# EAGLE board IV9 (EAGLE 9.6.2)
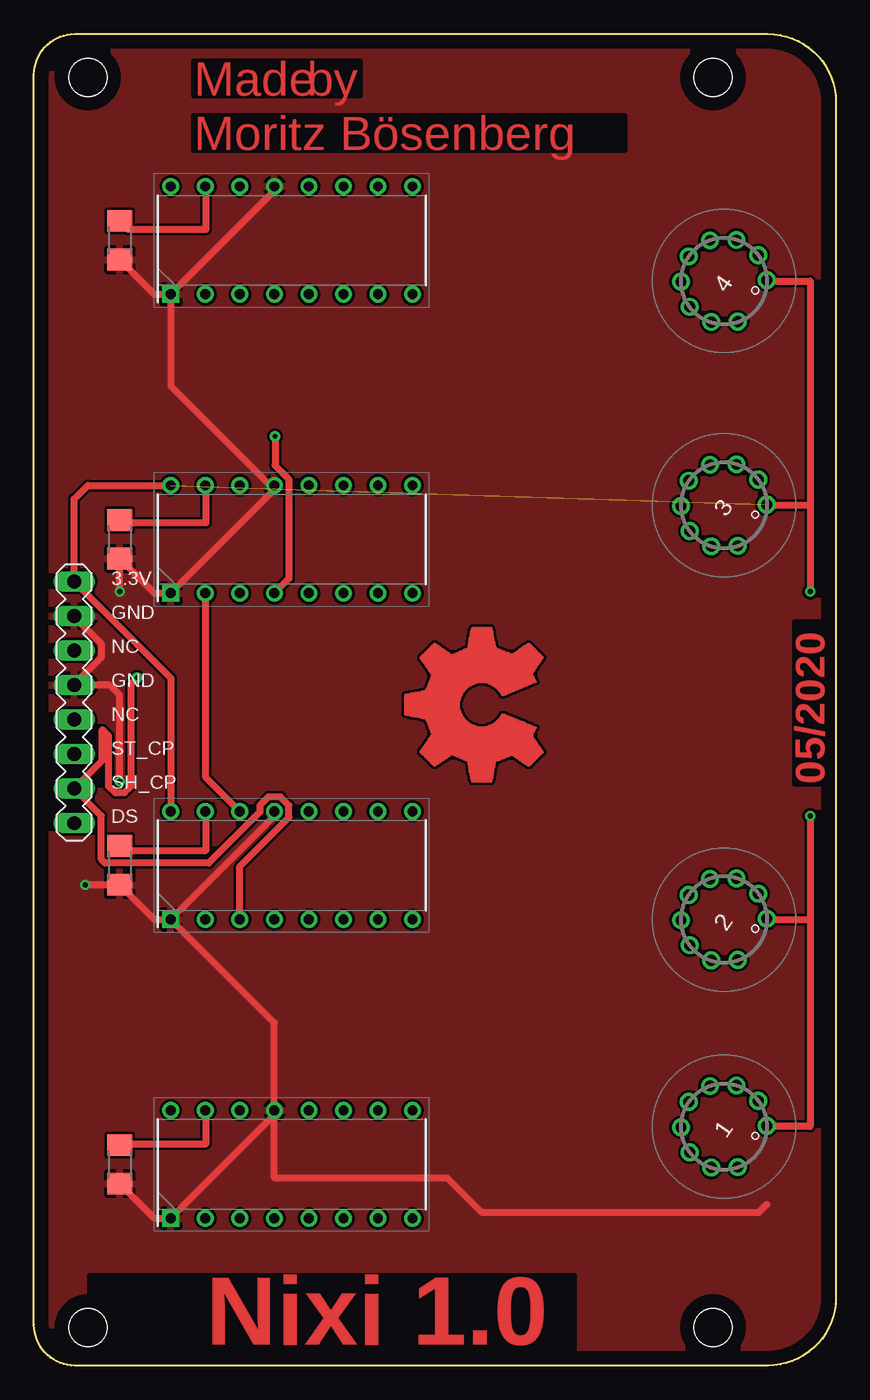
[diagram p0: board, top side]
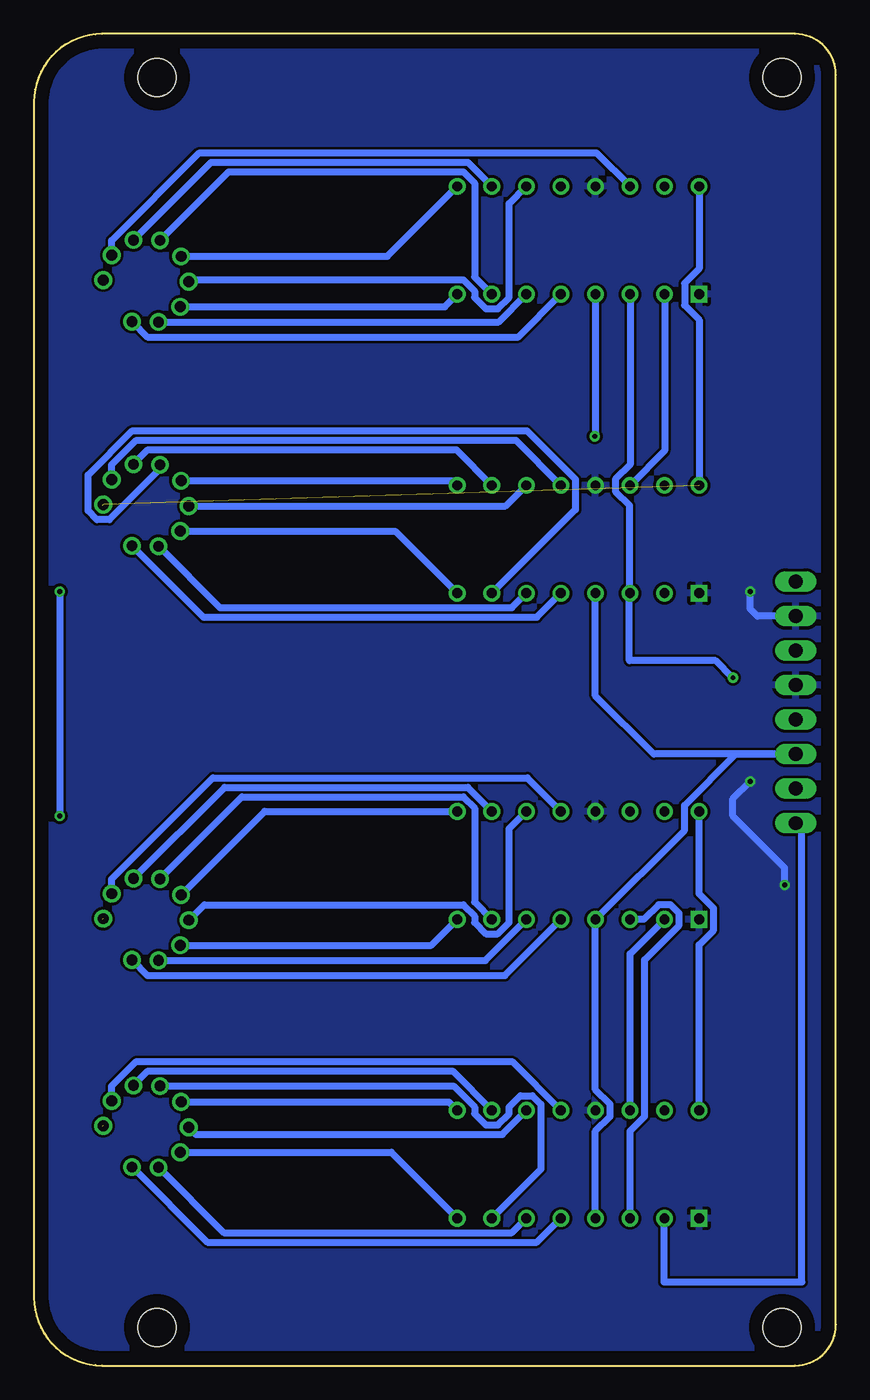
[diagram p1: board, bottom side, seen from below]

Size 59 x 98 mm. Coordinates in mm from the lower left corner, seen from the top.
Outline: 3,98 54,98 arc-90 59,93 59,5 arc-90 54,0 3,0 arc-90 0,3 0,95 arc-90 3,98
Copper layers (1*16): Top 0.035mm / dielectric 1.5mm / Bottom 0.035mm
Design rules "default": minimum track width 6mil, minimum drill 0.35mm, track to track 6mil, track to pad 6mil, pad to pad 6mil, via to via 6mil, smd to smd 6mil, copper to edge 40mil, drill to drill 6mil, minimum pad ring 10mil, minimum via ring 8mil, stop-mask expansion 4mil, vias tented up to drill 0mil, thermal gap 10mil
Net classes: 0 default: width 0.5 mm, drill 0.3 mm, clearance 0.2 mm; 1 other: width 0.5 mm, drill 0.2 mm, clearance 0.2 mm
Holes 2.8 mm at 3.96,2.81 49.96,2.81 3.96,94.81 49.96,94.81

## Footprints (pad centres in the part's own frame; a part is rotated, then mirrored left to right if it is on the bottom)
IV-9 = drill 0.8: 1 1.854,-2.552; 2 3,-0.975; 3 3,0.975; 4 1.854,2.552; 5 0,3.154; 6 -1.854,2.552; 7 -3,0.975; 8 -3,-0.975; 9 -1.854,-2.552
DIP794W53P254L1930H508Q16N = drill 0.73 pad 1.13 square: 1 -3.97,8.89 | drill 0.73 pad 1.13: 2 -3.97,6.35; 3 -3.97,3.81; 4 -3.97,1.27; 5 -3.97,-1.27; 6 -3.97,-3.81; 7 -3.97,-6.35; 8 -3.97,-8.89; 9 3.97,-8.89; 10 3.97,-6.35; 11 3.97,-3.81; 12 3.97,-1.27; 13 3.97,1.27; 14 3.97,3.81; 15 3.97,6.35; 16 3.97,8.89
R1206 = smd 1.6 x 1.803: 1 -1.422,0; 2 1.422,0
MA08-1 = drill 1.016 long: 1 -8.89,0; 2 -6.35,0; 3 -3.81,0; 4 -1.27,0; 5 1.27,0; 6 3.81,0; 7 6.35,0; 8 8.89,0

## Placement (x,y rotation side)
1  IV-9  [IV-9]  50.76,17.59 55 top
2  IV-9  [IV-9]  50.76,32.83 55 top
3  IV-9  [IV-9]  50.76,63.31 55 top
4  IV-9  [IV-9]  50.76,79.82 55 top
IC1  TLC5916IN  [DIP794W53P254L1930H508Q16N]  18.96,14.81 90 top
IC2  TLC5916IN  [DIP794W53P254L1930H508Q16N]  18.96,36.81 90 top
IC3  TLC5916IN  [DIP794W53P254L1930H508Q16N]  18.96,60.81 90 top
IC4  TLC5916IN  [DIP794W53P254L1930H508Q16N]  18.96,82.81 90 top
R1  1K  [R1206]  6.31,14.81 90 top
R2  1K  [R1206]  6.31,36.81 90 top
R3  1K  [R1206]  6.31,60.81 90 top
R4  1K  [R1206]  6.31,82.81 90 top
SV2  [MA08-1]  2.96,48.81 90 top

## Library data of the parts
1-4 = domestichacks
IC1-IC4 = NixieTube; DESCRIPTION: 8-CHANNEL CONSTANT-CURRENT LED SINK DRIVERS; HEIGHT: 5.08mm; MANUFACTURER_NAME: Texas Instruments; MANUFACTURER_PART_NUMBER: TLC5916IN; MOUSER_PART_NUMBER: 595-TLC5916IN; MOUSER_PRICE-STOCK: https://www.mouser.com/Search/Refine.aspx?Keyword=595-TLC5916IN
R1-R4 = rcl; SPICEPREFIX: R
SV2 = CommonParts; OC_FARNELL: unknown; OC_NEWARK: unknown

## Nets
3.3V: 1.1 2.1 3.1 4.1 IC1.16 IC2.16 IC3.16 IC4.16 SV2.8
A_1: 1.5 IC1.9
A_2: 2.5 IC2.9
A_3: 3.5 IC3.9
A_4: 4.5 IC4.9
B_1: 1.3 IC1.10
B_2: 2.3 IC2.10
B_3: 3.3 IC3.10
B_4: 4.3 IC4.10
C_1: 1.4 IC1.7
C_2: 2.4 IC2.7
C_3: 3.4 IC3.7
C_4: 4.4 IC4.7
D_1: 1.8 IC1.6
D_2: 2.8 IC2.6
D_3: 3.8 IC3.6
D_4: 4.8 IC4.6
DEC_1: 1.2 IC1.12
DEC_2: 2.2 IC2.12
DEC_3: 3.2 IC3.12
DEC_4: 4.2 IC4.14
DS: IC1.2 SV2.1
E_1: 1.9 IC1.5
E_2: 2.9 IC2.5
E_3: 3.9 IC3.5
E_4: 4.9 IC4.5
F_1: 1.6 IC1.11
F_2: 2.6 IC2.11
F_3: 3.6 IC3.11
F_4: 4.6 IC4.11
G_1: 1.7 IC1.8
G_2: 2.7 IC2.8
G_3: 3.7 IC3.8
G_4: 4.7 IC4.8
GND: IC1.1 IC1.13 IC2.1 IC2.13 IC3.1 IC3.13 IC4.1 IC4.13 R1.1 R2.1 R3.1 R4.1 SV2.5 SV2.7
N$49: IC1.14 IC2.2
N$52: IC2.14 IC3.2
N$53: IC3.14 IC4.2
NC: SV2.6
NC2: SV2.4
R-EXT1: IC1.15 R1.2
R-EXT2: IC2.15 R2.2
R-EXT3: IC3.15 R3.2
R-EXT4: IC4.15 R4.2
SH_CP: IC1.3 IC2.3 IC3.3 IC4.3 SV2.2
ST_CP: IC1.4 IC2.4 IC3.4 IC4.4 SV2.3

## Tracks (layer width: path | path; a pad name or v marks a point on that pad's centre or on a via)
3.3V  (via drill 0.35)  (4 unrouted)
  Top 0.5: IC2.16 10.07,50.59 SV2.8 2.96,63.77 3.97,64.78 IC3.16 | 4.1 53.97,79.82 57.11,79.82 57.11,63.31 | 57.11,63.31 v57.11,56.96 | v57.11,40.45 57.11,32.83 | 57.11,32.83 57.11,17.59 53.97,17.59 | 53.97,32.83 57.11,32.83 | 53.97,63.31 57.11,63.31
  Bottom 0.5: IC1.16 10.07,30.97 9,32.04 9,33.65 10.07,34.71 IC2.16 | IC4.16 10.07,80.71 11.14,79.64 11.14,78.03 10.07,76.97 IC3.16 | v57.11,56.96 v57.11,40.45
A_1
  Bottom 0.5: 1.5 28.47,19.4 IC1.9 | 1.5
A_2
  Bottom 0.5: 2.5 42.04,40.78 IC2.9 | 2.5
A_3
  Bottom 0.5: 3.5 28.19,65.12 IC3.9 | 3.5
A_4
  Bottom 0.5: 4.5 33,81.63 IC4.9 | 4.5
B_1
  Bottom 0.5: 1.3 50.61,21.68 28.21,21.68 IC1.10
B_2
  Bottom 0.5: 2.3 44.98,42.55 27.08,42.55 IC2.10
B_3
  Bottom 0.5: 3.3 50.61,67.4 27.93,67.4 IC3.10
B_4
  Bottom 0.5: 4.3 45.97,88.55 27.08,88.55 IC4.10
C_1
  Bottom 0.5: 1.4 28.13,20.57 26.58,19.02 26.58,18.54 25.75,17.71 24.87,17.71 24.04,18.54 24.04,19.02 23.21,19.85 22.33,19.85 21.7,19.22 21.7,14.45 IC1.7
C_2
  Bottom 0.5: 2.4 43.7,41.85 27.41,41.85 26.58,41.02 26.58,34.11 IC2.7
C_3
  Bottom 0.5: 3.4 49.73,65.98 53.46,62.26 54.37,62.26 55.02,62.91 55.02,65.54 51.76,68.8 22.73,68.8 19.16,65.22 19.16,62.99 IC3.7
C_4
  Bottom 0.5: 4.4 44.69,87.85 27.41,87.85 26.58,87.02 26.58,80.11 IC4.7
D_1
  Bottom 0.5: 1.8 45.04,9.77 23.84,9.77 IC1.6 | 1.8
D_2
  Bottom 0.5: 2.8 25.8,29.81 IC2.6 | 2.8
D_3
  Bottom 0.5: 3.8 45.31,55.77 23.84,55.77 IC3.6 | 3.8
D_4
  Bottom 0.5: 4.8 24.81,76.8 IC4.6 | 4.8
DEC_1
  Bottom 0.5: 1.2 53.28,20.57 51.47,22.38 23.83,22.38 IC1.12 | 1.2
DEC_2
  Bottom 0.5: 2.2 53.28,35.81 45.84,43.25 22.7,43.25 IC2.12 | 2.2
DEC_3
  Bottom 0.5: 3.2 53.28,66.29 51.47,68.1 23.55,68.1 IC3.12 | 3.2
DEC_4
  Bottom 0.5: 4.2 53.28,82.8 46.83,89.25 17.62,89.25 IC4.14 | 4.2
DS
  Bottom 0.5: IC1.2 12.66,10.79 12.66,6.16 2.5,6.16 2.5,39.46 SV2.1
E_1
  Bottom 0.5: 1.9 46.25,9.07 22,9.07 21.88,9.19 IC1.5 | 1.9
E_2
  Bottom 0.5: 2.9 50.65,28.71 24.36,28.71 IC2.5 | 2.9
E_3
  Bottom 0.5: 3.9 46.53,55.07 22,55.07 IC3.5 | 3.9
E_4
  Bottom 0.5: 4.9 50.65,75.7 23.37,75.7 IC4.5 | 4.9
F_1
  Bottom 0.5: 1.6 47.08,17.01 24.54,17.01 IC1.11 | 1.6
F_2
  Bottom 0.5: 2.6 46.47,33.91 27.41,33.91 26.58,33.08 26.58,32.6 25.75,31.77 24.87,31.77 24.04,32.6 24.04,39.51 IC2.11 | 2.6
F_3
  Bottom 0.5: 3.6 24.3,63.26 IC3.11 | 3.6
F_4
  Bottom 0.5: 4.6 47.46,79.91 27.41,79.91 26.58,79.08 26.58,78.6 25.75,77.77 24.87,77.77 24.04,78.6 24.04,85.51 IC4.11 | 4.6
G_1
  Bottom 0.5: 1.7 32.7,15.69 IC1.8 | 1.7
G_2
  Bottom 0.5: 2.7 29.76,30.93 IC2.8 | 2.7
G_3
  Bottom 0.5: 3.7 32.42,61.41 IC3.8 | 3.7
G_4
  Bottom 0.5: 4.7 28.77,77.92 IC4.8 | 4.7
GND  (via drill 0.35)
  Top 0.5: R1.1 8.86,10.84 IC1.1 17.69,18.46 | IC2.1 8.86,32.84 R2.1 6.29,35.37 v3.77,35.37 | R4.1 8.86,78.84 IC4.1 | IC4.1 17.69,86.46 IC4.13 | 17.69,64.46 IC3.1 8.86,56.84 R3.1 v6.31,56.96 | 17.69,64.46 IC3.13 | IC2.1 17.69,40.46 IC2.13 | 17.69,18.46 IC1.13 17.69,25.22 IC2.1 | 53.91,11.85 53.3,11.24 32.98,11.24 30.44,13.78 17.74,13.78 17.69,13.83 17.69,18.46 | v6.31,42.99 6.31,49.34 5.57,50.08 SV2.5 2.96,50.14 4.93,52.12 4.93,53.12 2.96,55.1 SV2.7 | IC4.1 10.07,72.08 17.69,64.46
  Bottom 0.5: v3.77,35.37 3.77,36.64 7.58,40.45 7.58,41.72 v6.31,42.99 | SV2.7 5.78,55.16 6.31,55.69 v6.31,56.96
  pour Bottom: -0.04,97.6 59.65,97.6 59.65,-0.19 -0.04,-0.19
  pour Top: -0.04,97.6 59.65,97.6 59.65,-0.19 -0.04,-0.19
N$49
  Bottom 0.5: IC1.14 15.15,30.3 IC2.2
N$52
  Top 0.5: IC3.2 12.61,43.32 IC2.14
N$53
  Bottom 0.5: IC4.2 12.61,67.32 IC3.14
R-EXT1
  Top 0.5: R1.2 6.4,16.32 12.66,16.32 12.66,18.73 IC1.15
R-EXT2
  Top 0.5: R2.2 6.63,37.91 12.66,37.91 12.66,40.73 IC2.15
R-EXT3
  Top 0.5: R3.2 6.5,62.04 12.66,62.04 12.66,64.73 IC3.15
R-EXT4
  Top 0.5: R4.2 6.91,83.63 12.66,83.63 12.66,86.73 IC4.15
SH_CP  (via drill 0.35)
  Top 0.5: IC2.3 15.15,36.73 18.76,40.34 18.76,41.22 18.13,41.85 17.25,41.85 16.62,41.22 16.62,40.74 12.86,36.98 5.22,36.98 4.96,37.25 4.96,40.46 SV2.2 5.04,44.54 5.04,46.8 5.48,46.36 5.48,42.65 5.97,42.16 6.65,42.16 7.14,42.65 7.14,50.17 v7.58,50.61
  Bottom 0.5: IC1.3 15.15,17.27 14.08,18.34 14.08,29.86 11.54,32.4 11.54,33.28 12.17,33.91 13.05,33.91 14.12,32.84 IC2.3 | v7.58,50.61 8.85,51.88 15.2,51.88 15.2,56.79 | 15.2,56.79 IC3.3 | IC4.3 15.15,66.29 16.22,65.22 16.22,64.34 15.2,63.32 15.2,56.79
ST_CP  (via drill 0.35)
  Top 0.5: v17.74,68.39 17.74,66.24 18.76,65.22 18.76,57.91 IC3.4
  Bottom 0.5: IC1.4 17.69,17.27 16.62,18.34 16.62,19.22 17.69,20.29 IC2.4 11.14,39.39 11.14,41.22 7.36,45 SV2.3 13.4,45 17.69,49.29 IC3.4 | IC4.4 17.69,68.44 v17.74,68.39
(copper drawn outside any net)
  shapes: Top area x369

## Text on the board
Top: Made | by | Moritz Bösenberg | 05/2020 | Nixi 1.0
tNames: 3.3V | GND | NC | GND | NC | ST_CP | SH_CP | DS
tStop: Made | by | Moritz Bösenberg | 05/2020 | Nixi 1.0
tKeepout: Nixi 1.0